# Altium PCB Copy of MainBoardPcb.PcbDoc
Units mil, origin at the board's own origin, x right, y up, seen from the top; angles counter-clockwise.
Board outline 6000 x 4000 mil, 2 copper layers (Top Layer, Bottom Layer); 17 components, 14 nets, 80 pads, 0 vias.
Unrouted connection lines stored in the file: 30.
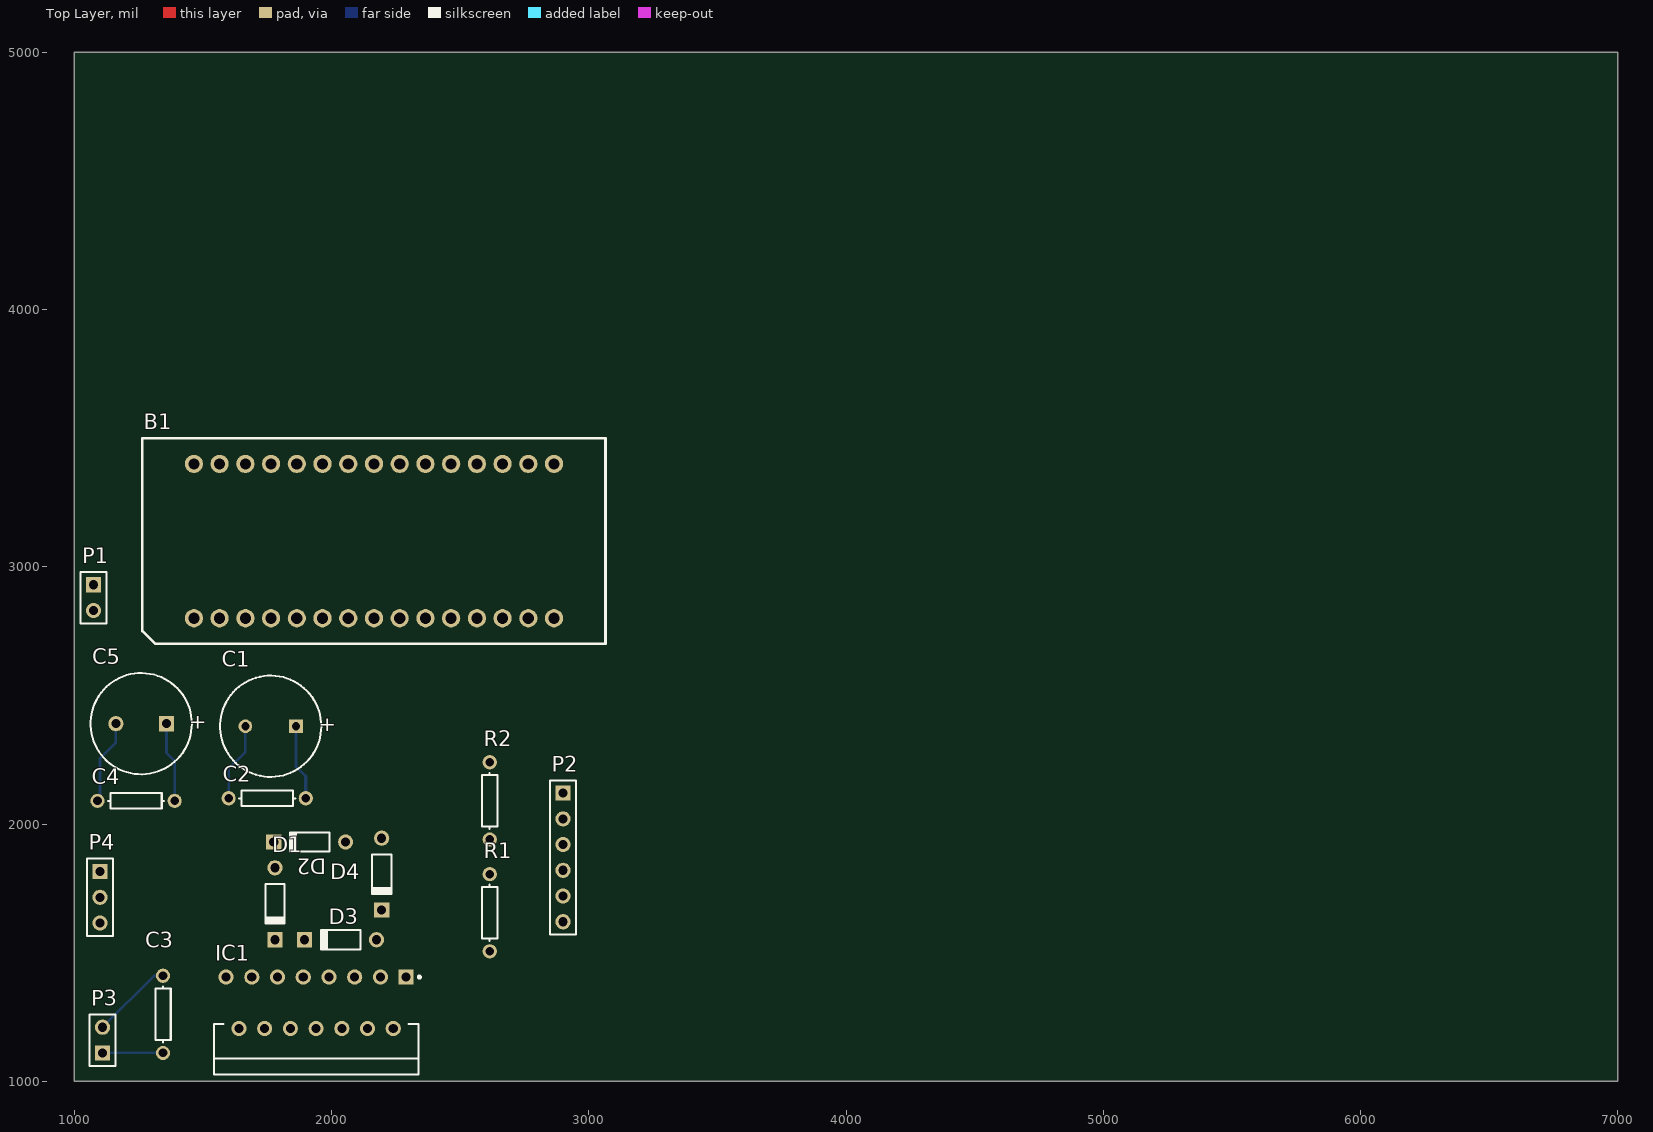
[diagram p0: Top Layer view]
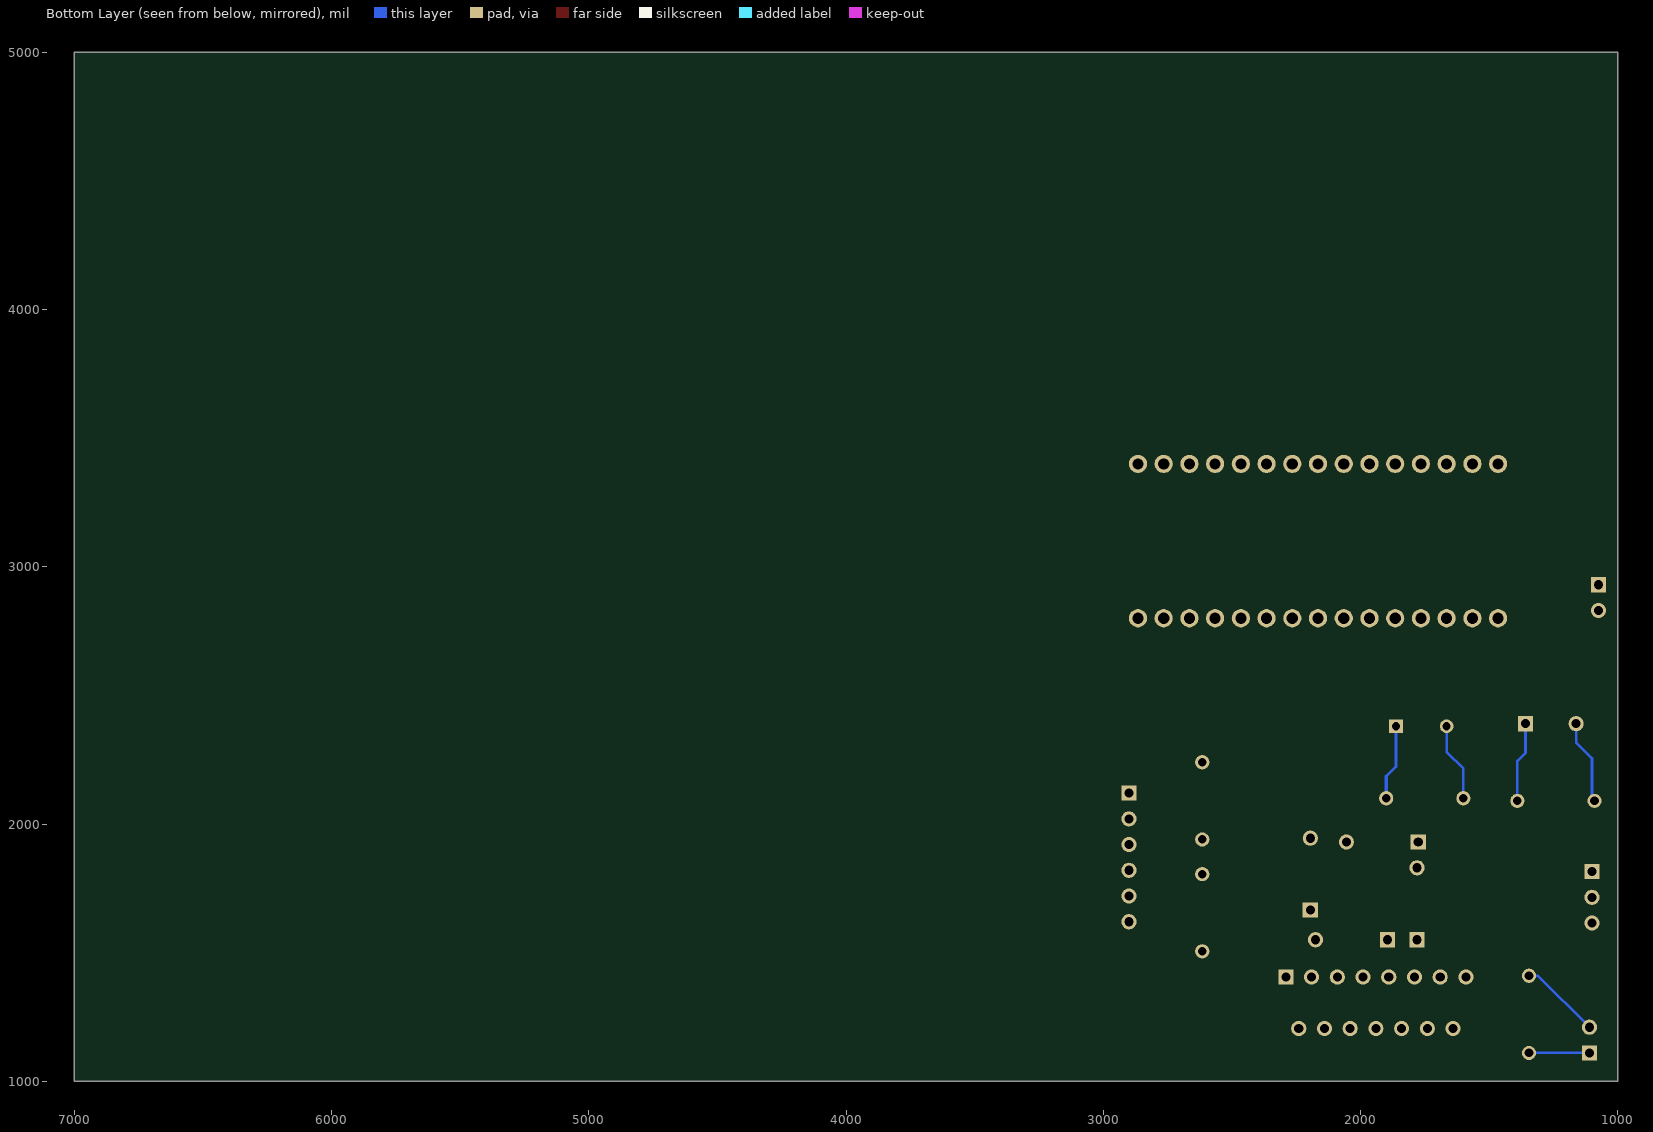
[diagram p1: Bottom Layer view, seen from below]

## Layer stack, top to bottom
Top Solder: solder mask 0.4, Solder Resist, Dk 3.5
Top Layer: signal copper 1.4
Dielectric 1: dielectric 12.6, FR-4, Dk 4.8
Bottom Layer: signal copper 1.4
Bottom Solder: solder mask 0.4, Solder Resist, Dk 3.5

## Board outline
1000,1000 7000,1000 7000,5000 1000,5000

## Design rules (kind name [scope] priority, off if disabled: settings)
Clearance [All] p1: gap=10 ignorepadtopadclearanceinfootprint=FALSE except(0: Arc-Hole Track-Hole SMDPad-Hole THPad-Hole Via-Hole Fill-Hole Poly-Hole Region-Hole Text-Hole)
PolygonConnect [All] p1: connectstyle=Relief reliefconductorwidth=10 reliefentries=4 polygonreliefangle="90 Angle" airgapwidth=10
RoutingVias [All] p1: holewidth=28 width=50 viastyle="Through Hole" minholewidth=28 minwidth=50 maxholewidth=28 maxwidth=50
SolderMaskExpansion [All] p1: expansion=4
Width [All] p1: maxlimit=10 minlimit=10 preferedwidth=10
30 further rules are at their usual default settings.

## Components (designator, comment, footprint, x,y, rotation, side; value= is the part's Value field where it differs from the comment)
B1 "Nano" PCBComponent_1 1465,2800 r90 top
C1 "470uF" F' 1763.43,2380 r180 top value=68uF
C2 "" AXIAL-0.3 1750,2100 r0 top value=100nF
C3 "" AXIAL-0.3 1345,1260 r90 top value=100nF
C4 "" AXIAL-0.3 1240,2090 r180 top value=100nF
C5 "470uF" F 1260,2390 r180 top
D1 "Diode 1N914" DO-35 1780,1690 r270 top
D2 "Diode 1N914" DO-35 1915,1930 r180 top
D3 "Diode 1N914" DO-35 2035,1550 r180 top
D4 "Diode 1N914" DO-35 2195,1805 r270 top
IC1 "L298N" Multiwatt15(Vertical) 1940,1305 r180 top
P1 "Power Supply" HDR1X2 1075,2930 r270 top
P2 "BT" HDR1X6 2900,2120 r270 top
P3 "Motor" HDR1X2 1110,1110 r90 top
P4 "Servo" HDR1X3 1100,1815 r270 top
R1 "" AXIAL-0.3 2615,1655 r270 top
R2 "" AXIAL-0.3 2615,2090 r90 top value=2.2K

## Footprints (in the part's own frame and the unit in brackets; to place one, negate y for a bottom-side part, rotate by r counter-clockwise, add the part's x,y. Pads: shape width x height; smd on the part's side, far side on the other; paste and mask are expansions set on the pad)
AXIAL-0.3 [mm] "Axial Device, Thru-Hole; 2 Leads; 0.3 in Pin Spacing"
  round 1.4 hole 0.85: 1(-3.81,0) 2(3.81,0)
  silkscreen extent -2.77,-0.76 2.77,0.76
DO-35 [mm] "Diode, Axial; Body 3.8 x 1.9 mm (LxDia. max), Lead Dia. 0.53 mm (max)"
  round 1.5 hole 0.9: 1(-3.55,0)
  rect 1.5x1.5 hole 0.9: 2(3.55,0)
  silkscreen extent -1.95,-0.95 2.05,0.95
F [mm] "Capacitor, Electrolytic, Radial; Body 10 x 10.5 mm (Dia.xH typ); Pin Spacing 5 mm (typ)"
  rect 1.5x1.5 hole 0.9: 1(-2.5,0)
  round 1.5 hole 0.9: 2(2.5,0)
  silkscreen extent -5,-5 5,5
F' [mm] "Capacitor, Electrolytic, Radial; Body 10 x 5 mm (Dia.xH typ); Pin Spacing 5 mm (typ)"
  rect 1.35x1.35 hole 0.8: 1(-2.5,0)
  round 1.35 hole 0.8: 2(2.5,0)
  silkscreen extent -5,-5 5,5
HDR1X2 [mm] "Connector; Header; 2 Position"
  rect 1.5x1.5 hole 0.9: 1(0,0)
  round 1.5 hole 0.9: 2(2.54,0)
  silkscreen extent -1.27,-1.27 3.81,1.27
HDR1X3 [mm] "Connector; Header; 3 Position"
  rect 1.5x1.5 hole 0.9: 1(0,0)
  round 1.5 hole 0.9: 2(2.54,0) 3(5.08,0)
  silkscreen extent -1.27,-1.27 6.35,1.27
HDR1X6 [mm] "Connector; Header; 6 Position"
  rect 1.5x1.5 hole 0.9: 1(0,0)
  round 1.5 hole 0.9: 2(2.54,0) 3(5.08,0) 4(7.62,0) 5(10.16,0) 6(12.7,0)
  silkscreen extent -1.27,-1.27 13.97,1.27
Multiwatt15(Vertical) [mm] "TO, Thru-Hole, Vertical, Heatsink Mounted; 15 Bent Staggered Leads; Body 19.9x10.6x4.9mm, Pitch 1.27 mm"
  rect 1.5x1.5 hole 0.9: 1(-8.89,-2.54)
  round 1.5 hole 0.9: 2(-7.62,2.54) 3(-6.35,-2.54) 4(-5.08,2.54) 5(-3.81,-2.54) 6(-2.54,2.54) 7(-1.27,-2.54) 8(0,2.54) 9(1.27,-2.54) 10(2.54,2.54) 11(3.81,-2.54) 12(5.08,2.54) 13(6.35,-2.54) 14(7.62,2.54) 15(8.89,-2.54)
  silkscreen extent -10.32,-2.66 10.1,7.09, body extent -10.15,2.04 10.15,7.14, height 21
PCBComponent_1 [mm]
  round 1.8 hole 1.1: 1(0,0) 2(0,-2.54) 3(0,-5.08) 4(0,-7.62) 5(0,-10.16) 6(0,-12.7) 7(0,-15.24) 8(0,-17.78) 9(0,-20.32) 10(0,-22.86) 11(0,-25.4) 12(0,-27.94) 13(0,-30.48) 14(0,-33.02) 15(0,-35.56) 16(15.24,-35.56) 17(15.24,-33.02) 18(15.24,-30.48) 19(15.24,-27.94) 20(15.24,-25.4) 21(15.24,-22.86) 22(15.24,-20.32) 23(15.24,-17.78) 24(15.24,-15.24) 25(15.24,-12.7) 26(15.24,-10.16) 27(15.24,-7.62) 28(15.24,-5.08) 29(15.24,-2.54) 30(15.24,0)
  silkscreen extent -2.54,-40.64 17.78,5.08

## Part data
B1: "Development Boards & Kits - AVR ARDUINO NANO V3 A000005", Manufacturer_Name=Arduino, RS Part Number=6961667, Allied_Number=70518857, Allied Price/Stock=http://www.alliedelec.com/arduino-a000005/70518857/, Arrow Part Number=Nano, Arrow Price/Stock=http://uk.rs-online.com/web/p/products/6961667, Datasheet Link=http://docs-europe.electrocomponents.com/webdocs/0db9/0900766b80db99cb.pdf, Geometry.Height=7.62mm, Manufacturer_Part_Number=Nano, RS Price/Stock=http://uk.rs-online.com/web/p/products/6961667
C1: library part 94SL686X0016FBP, "Solid Aluminum Capacitor with Organic Semiconductor Electrolyte: 68uF, 16V, Bulk Pack", ComponentLink1Description="Manufacturer Link", ComponentLink1URL=http://www.vishay.com/, ComponentLink2Description=Datasheet, ComponentLink2URL=http://www.vishay.com/docs/90005/94sl.pdf, DatasheetDocument=23-May-2001, DrillSize="Nominal, Rounded to the nearest 0.1mm", Note="Part Numbers shown are for ± 20% capacitance tolerance (X0).", PackageReference=F', PCB_Layout="Complies with Manufacturer's Recommendation.", Published=19-Mar-2004, Publisher="Altium Limited"
C2 C4: library part Cap, "Capacitor", LatestRevisionDate=17-Jul-2002, LatestRevisionNote="Re-released for DXP Platform.", PackageDescription="Radial Cap, Thru-Hole; 2 Leads; 0.3 in Pin Spacing", PackageReference=RAD-0.3, Published=8-Jun-2000, Publisher="Altium Limited"
C3: library part Cap, LatestRevisionDate=17-Jul-2002, LatestRevisionNote="Re-released for DXP Platform.", PackageDescription="Radial Cap, Thru-Hole; 2 Leads; 0.3 in Pin Spacing", PackageReference=RAD-0.3, Published=8-Jun-2000, Publisher="Altium Limited"
C5: library part 94SS477X0004FBP, "Solid Aluminum Capacitor with Organic Semiconductor Electrolyte: 470uF, 4V, Bulk Pack", ComponentLink1Description="Manufacturer Link", ComponentLink1URL=http://www.vishay.com/, ComponentLink2Description=Datasheet, ComponentLink2URL=http://www.vishay.com/docs/90008/94ss.pdf, DatasheetDocument=23-May-2001, DrillSize="Nominal, Rounded to the nearest 0.1mm", Note="Part Numbers shown are for ± 20% capacitance tolerance (X0).", PackageReference=F, PCB_Layout="Complies with Manufacturer's Recommendation.", Published=19-Mar-2004, Publisher="Altium Limited"
D1 D2 D3 D4: "High Conductance Fast Diode", Code_JEDEC=DO-204-AH, ComponentLink1Description="Manufacturer Link", ComponentLink1URL=http://www.fairchildsemi.com/, ComponentLink2Description=Datasheet, ComponentLink2URL=http://www.fairchildsemi.com/ds/1N%2F1N4448.pdf, DatasheetVersion=1997, LatestRevisionDate=17-Jul-2002, LatestRevisionNote="Re-released for DXP Platform.", PackageDescription="Diode, Axial; Body 3.8 x 1.9 mm (LxDia. max), Lead Dia. 0.53 mm (max)", PackageReference=DO-35, Published=8-Jun-2000, Publisher="Altium Limited"
IC1: Package="Multiwatt-15 STMicroelectronics", Availability=Unavailable, MF=STMicroelectronics, MP=L298N, Price=None, SnapEDA_Link=https://www.snapeda.com/parts/L298N/STMicroelectronics/view-part/?ref=snap
P1: library part "Header 2", "Header, 2-Pin", LatestRevisionDate=17-Jul-2002, LatestRevisionNote="Re-released for DXP Platform.", Publisher="Altium Limited"
P2: library part "Header 6", "Bluetooth Mdule HC-05", LatestRevisionDate=17-Jul-2002, LatestRevisionNote="Re-released for DXP Platform.", Publisher="Altium Limited"
P3: library part "Header 2", LatestRevisionDate=17-Jul-2002, LatestRevisionNote="Re-released for DXP Platform.", Publisher="Altium Limited"
P4: library part "Header 3", "Header, 3-Pin", LatestRevisionDate=17-Jul-2002, LatestRevisionNote="Re-released for DXP Platform.", Publisher="Altium Limited"
R1 R2: library part Res1, "Resistor", LatestRevisionDate=17-Jul-2002, LatestRevisionNote="Re-released for DXP Platform.", PackageDescription="Axial Device, Thru-Hole; 2 Leads; 0.3 in Pin Spacing", PackageReference=AXIAL-0.3, Published=8-Jun-2000, Publisher="Altium Limited"
  R1: =1K

## Nets (pads, with @x,y where several pads share a name; then routed paths per layer and width w, separated by ;. In a path a pad name is that pad's centre, name@x,y a point inside that pad or via, vN(x,y) a via of type N, cw(c..) or ccw(c..) an arc to the next point about the centre after c; other vN are vias at no path point)
GND: C1.2 C2.1 D2.1 D4.1 IC1.8 P1.2 P2.2 R2.2 | length 306.9
  Bottom Layer w10: C2.1 1600,2215 1665,2280 C1.2
NetB1_1: B1.1 R1.2
NetB1_2: B1.2 P2.3
NetB1_8: B1.8 IC1.6
NetB1_9: B1.9 P4.3
NetB1_10: B1.10 IC1.5
NetB1_11: B1.11 IC1.7
NetB1_17: B1.17 P2.1
NetB1_27: B1.27 C4.1 C5.1 P4.2 | length 313.1
  Bottom Layer w10: C5.1 1358.43,2276.57 1390,2245 C4.1
NetB1_29: B1.29 C4.2 C5.2 P4.1 | length 329.6
  Bottom Layer w10: C4.2 1100,2100 1100,2255 1161.57,2316.57 C5.2
NetB1_30: B1.30 C1.1 C2.2 D1.2 D3.2 IC1.9 P1.1 | length 295.8
  Bottom Layer w10: C1.1 1861.85,2223.15 1900,2185
  Bottom Layer w15: C2.2 1900,2185
NetC3_1: C3.1 D1.1 D2.2 IC1.2 P3.1 | length 235
  Bottom Layer w10: P3.1 C3.1
NetC3_2: C3.2 D3.1 D4.2 IC1.3 P3.2 | length 317.8
  Bottom Layer w10: P3.2 1310,1410 C3.2
NetP2_4: P2.4 R1.1 R2.1
pads on no net: B1.3 B1.4 B1.5 B1.6 B1.7 B1.12 B1.13 B1.14 B1.15 B1.16 B1.18 B1.19 B1.20 B1.21 B1.22 B1.23 B1.24 B1.25 B1.26 B1.28 IC1.1 IC1.4 IC1.10 IC1.11 IC1.12 IC1.13 IC1.14 IC1.15 P2.5 P2.6

## Text inside footprints (layer, text, board x,y; h text height)
C1: Top Overlay "+" at 2018.35,2409.53 h59.06 r180
C5: Top Overlay "+" at 1514.92,2419.53 h59.06 r180